# Altium PCB 2016_Carte_Batteries.PcbDoc
Units mil, origin at the board's own origin, x right, y up, seen from the top; angles counter-clockwise.
Board outline 1811.02 x 2047.24 mil, 4 copper layers (1-TOP, 2-SIGNAL, 3-GND, 4-BOT), stack 68 mil thick; 9 components, 4 nets, 28 pads, 60 vias.
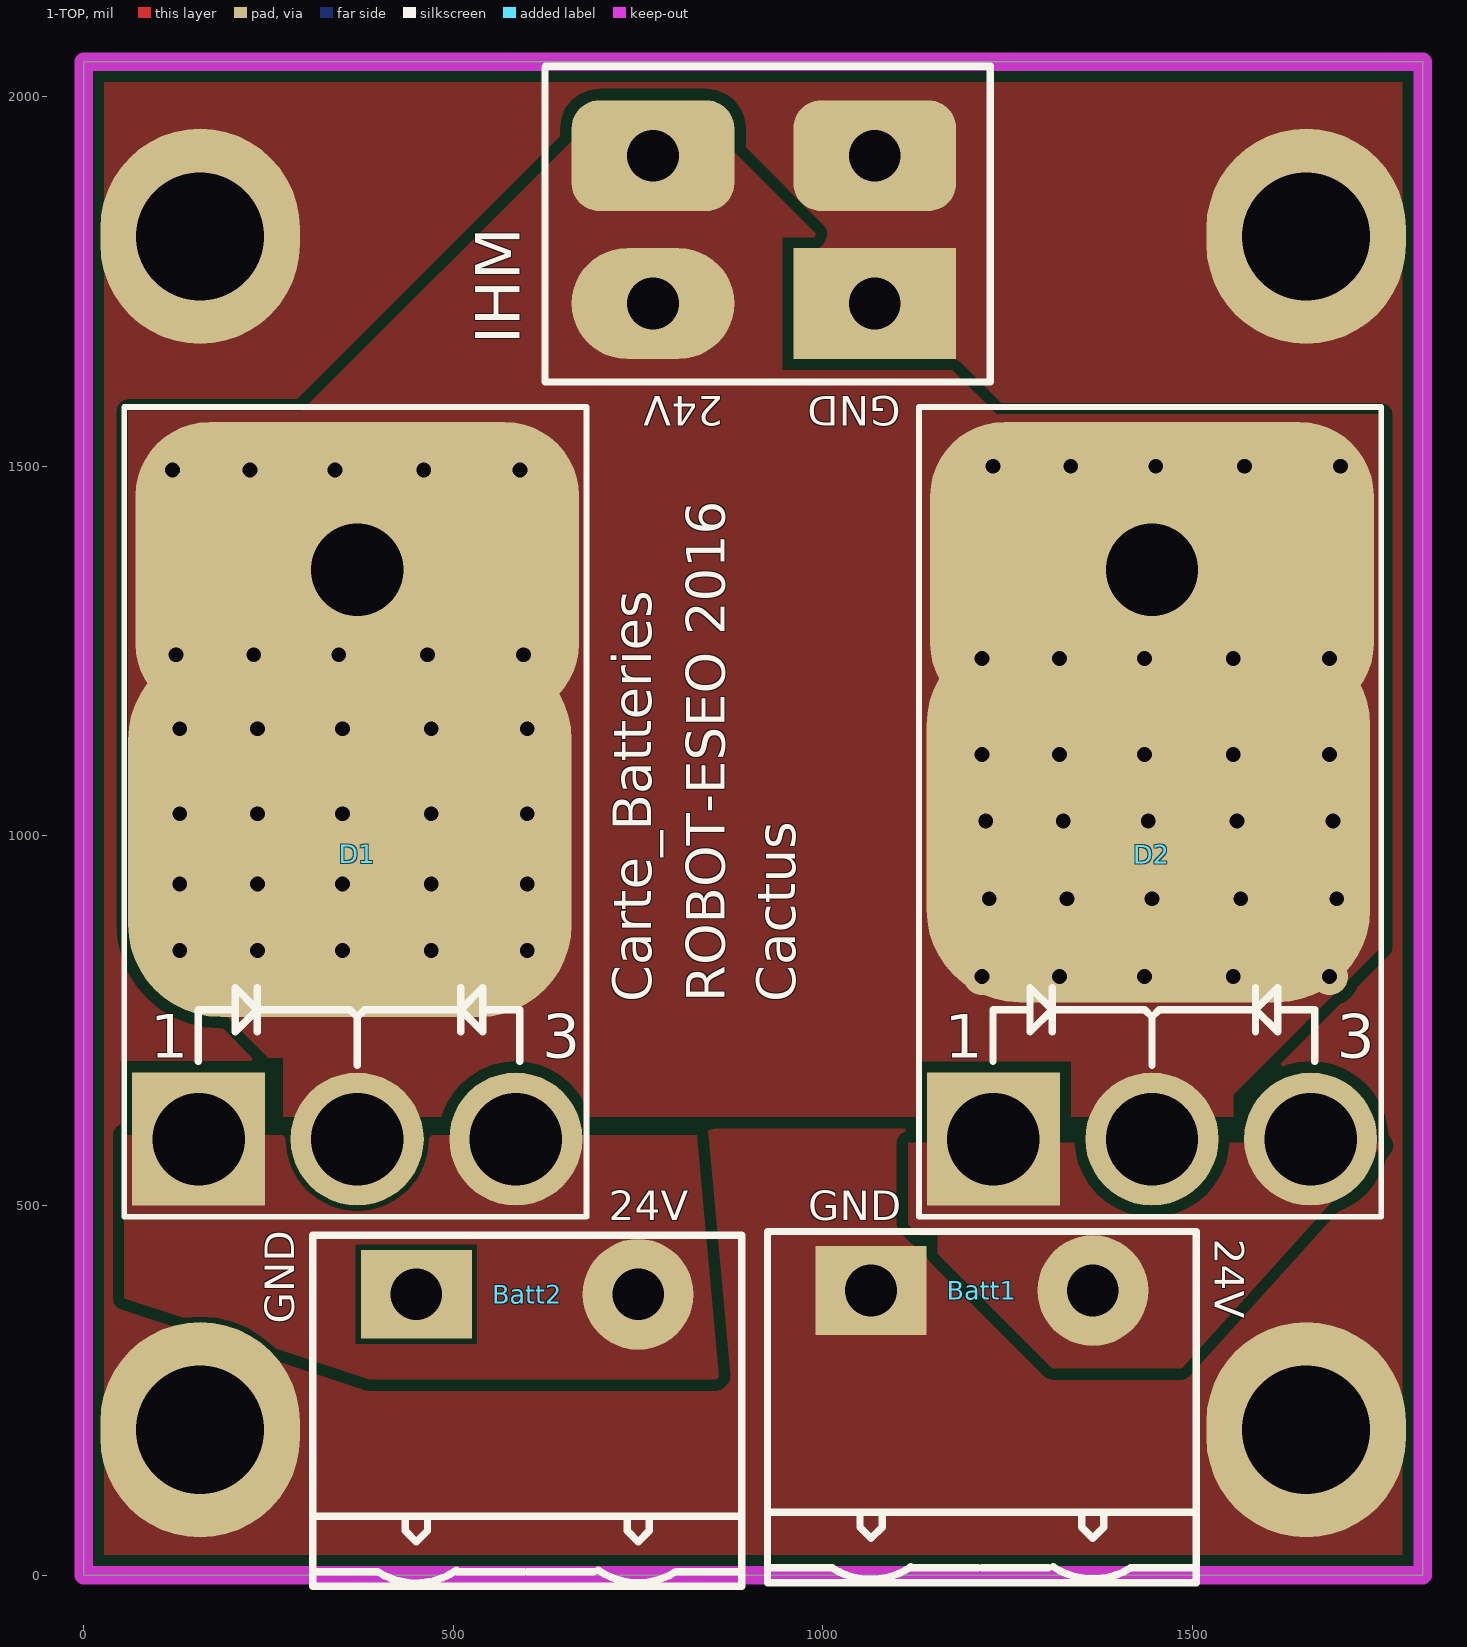
[diagram p0: 1-TOP view]
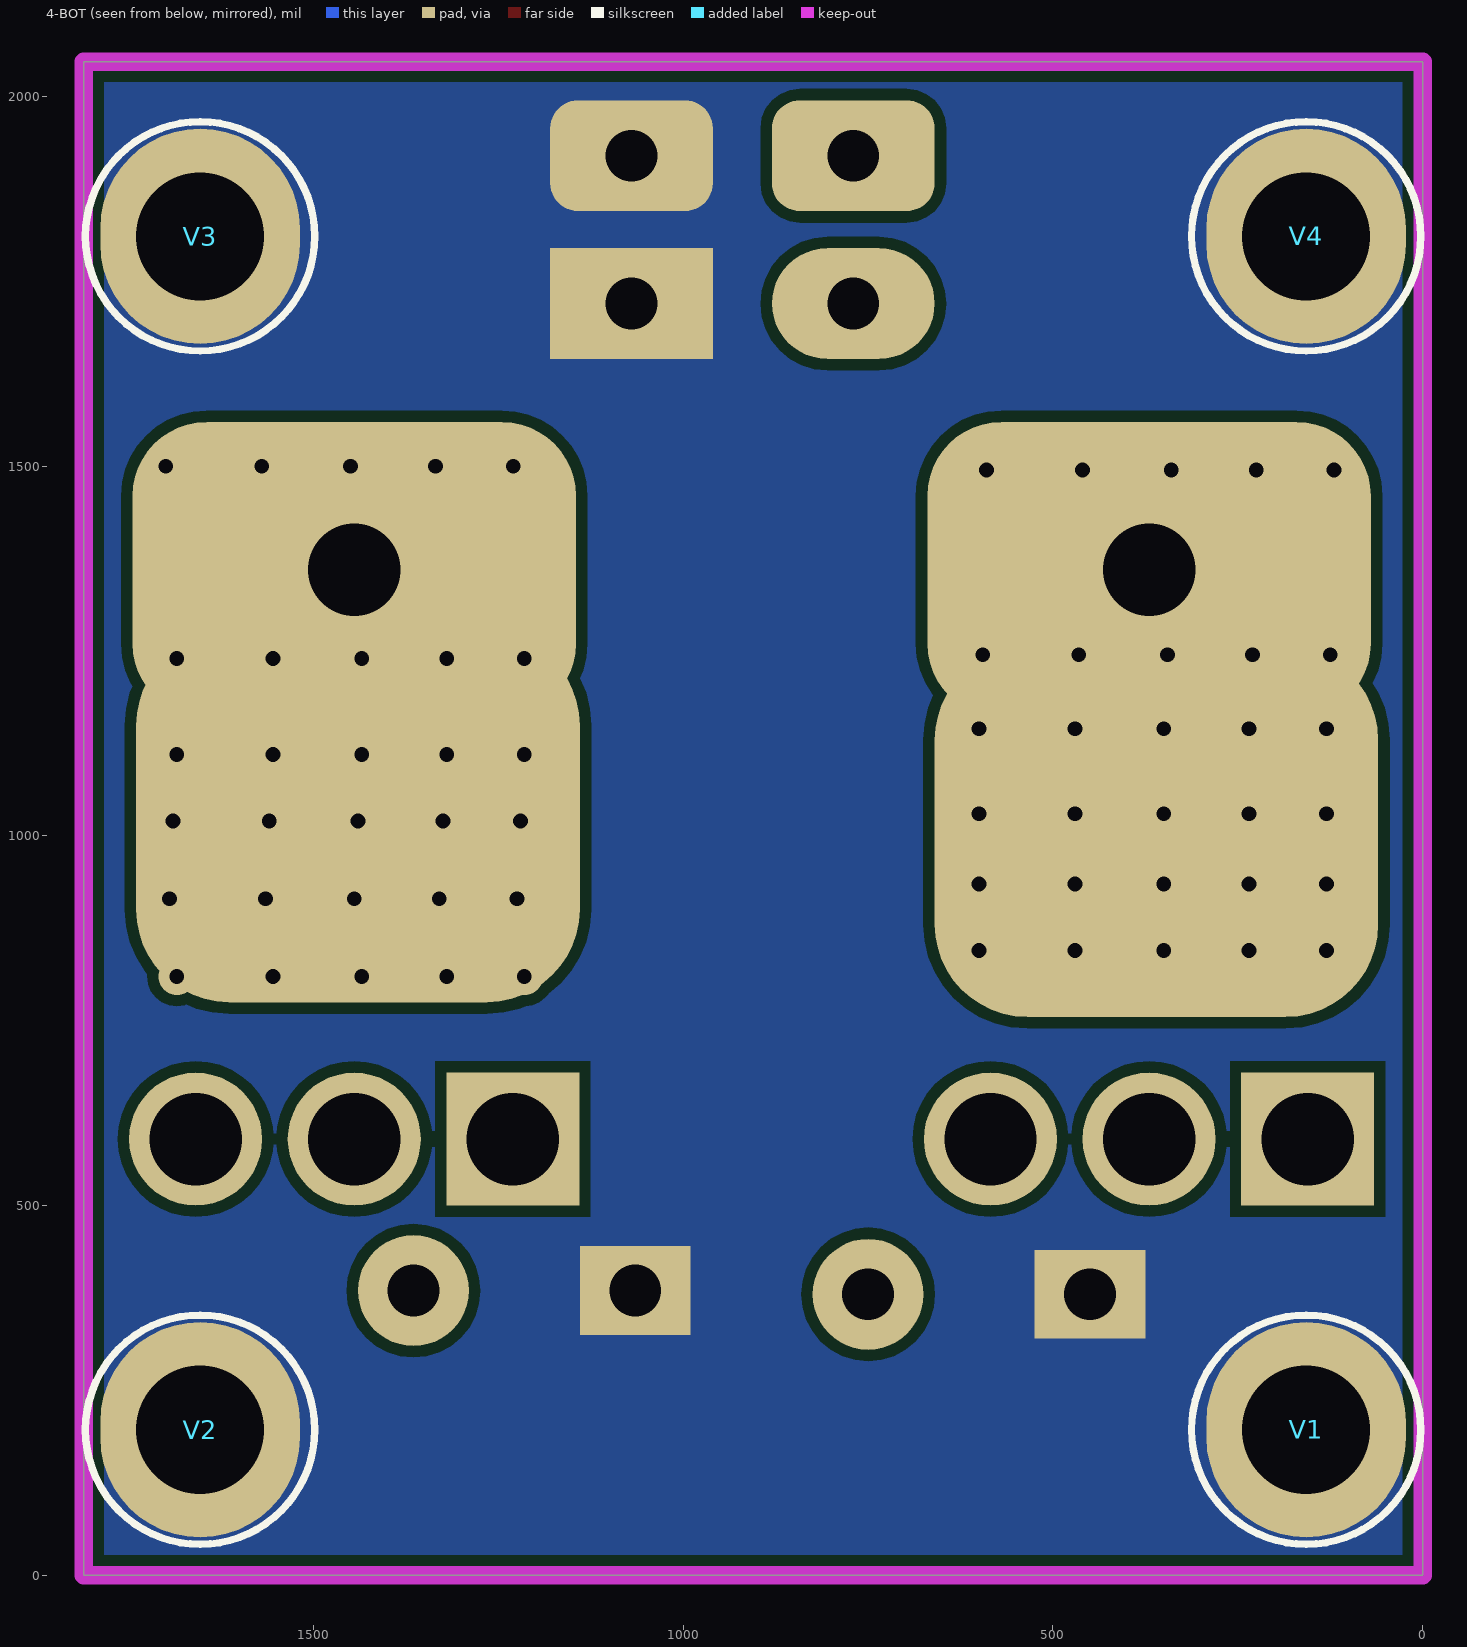
[diagram p1: 4-BOT view, seen from below]
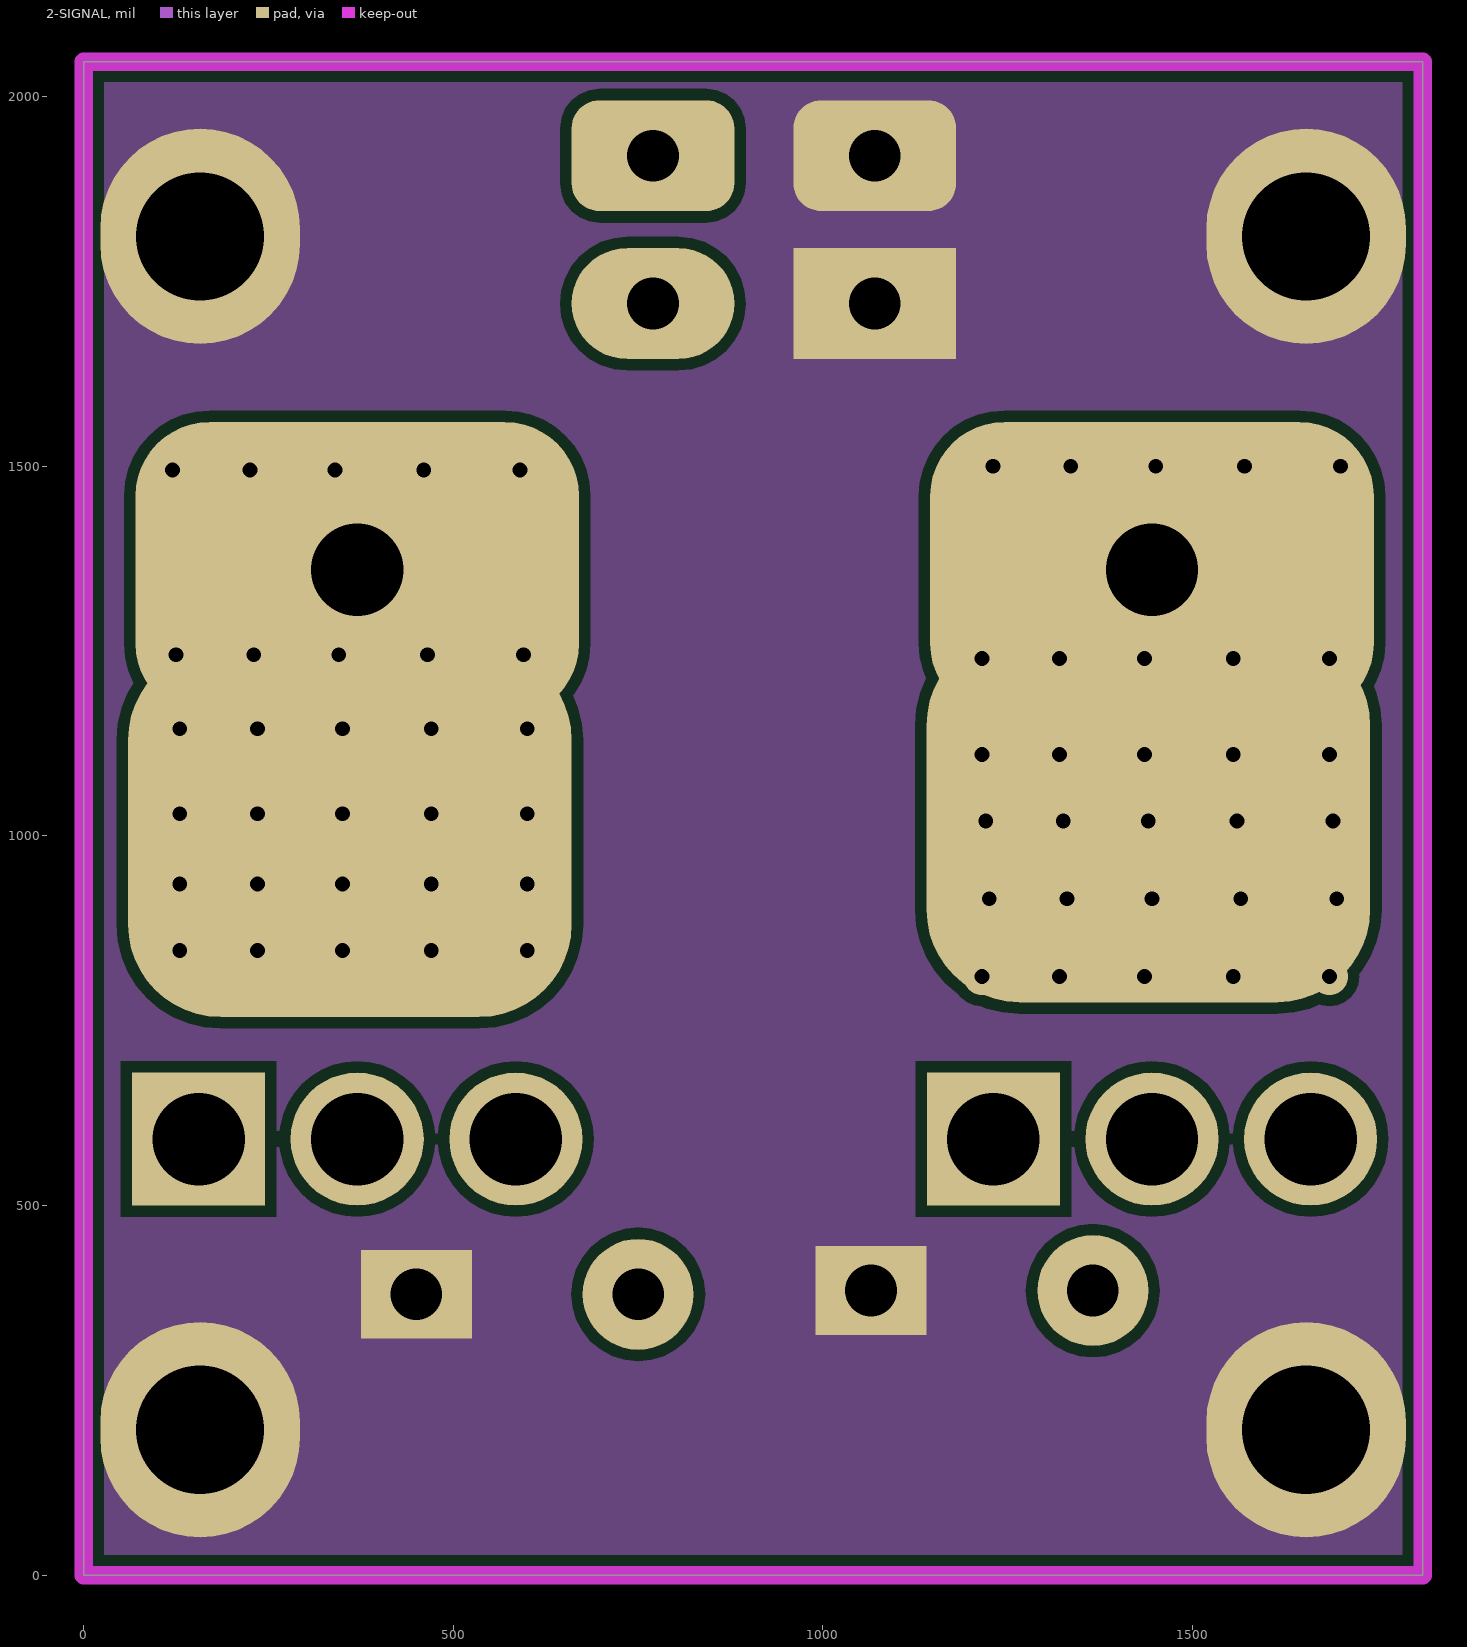
[diagram p2: 2-SIGNAL]
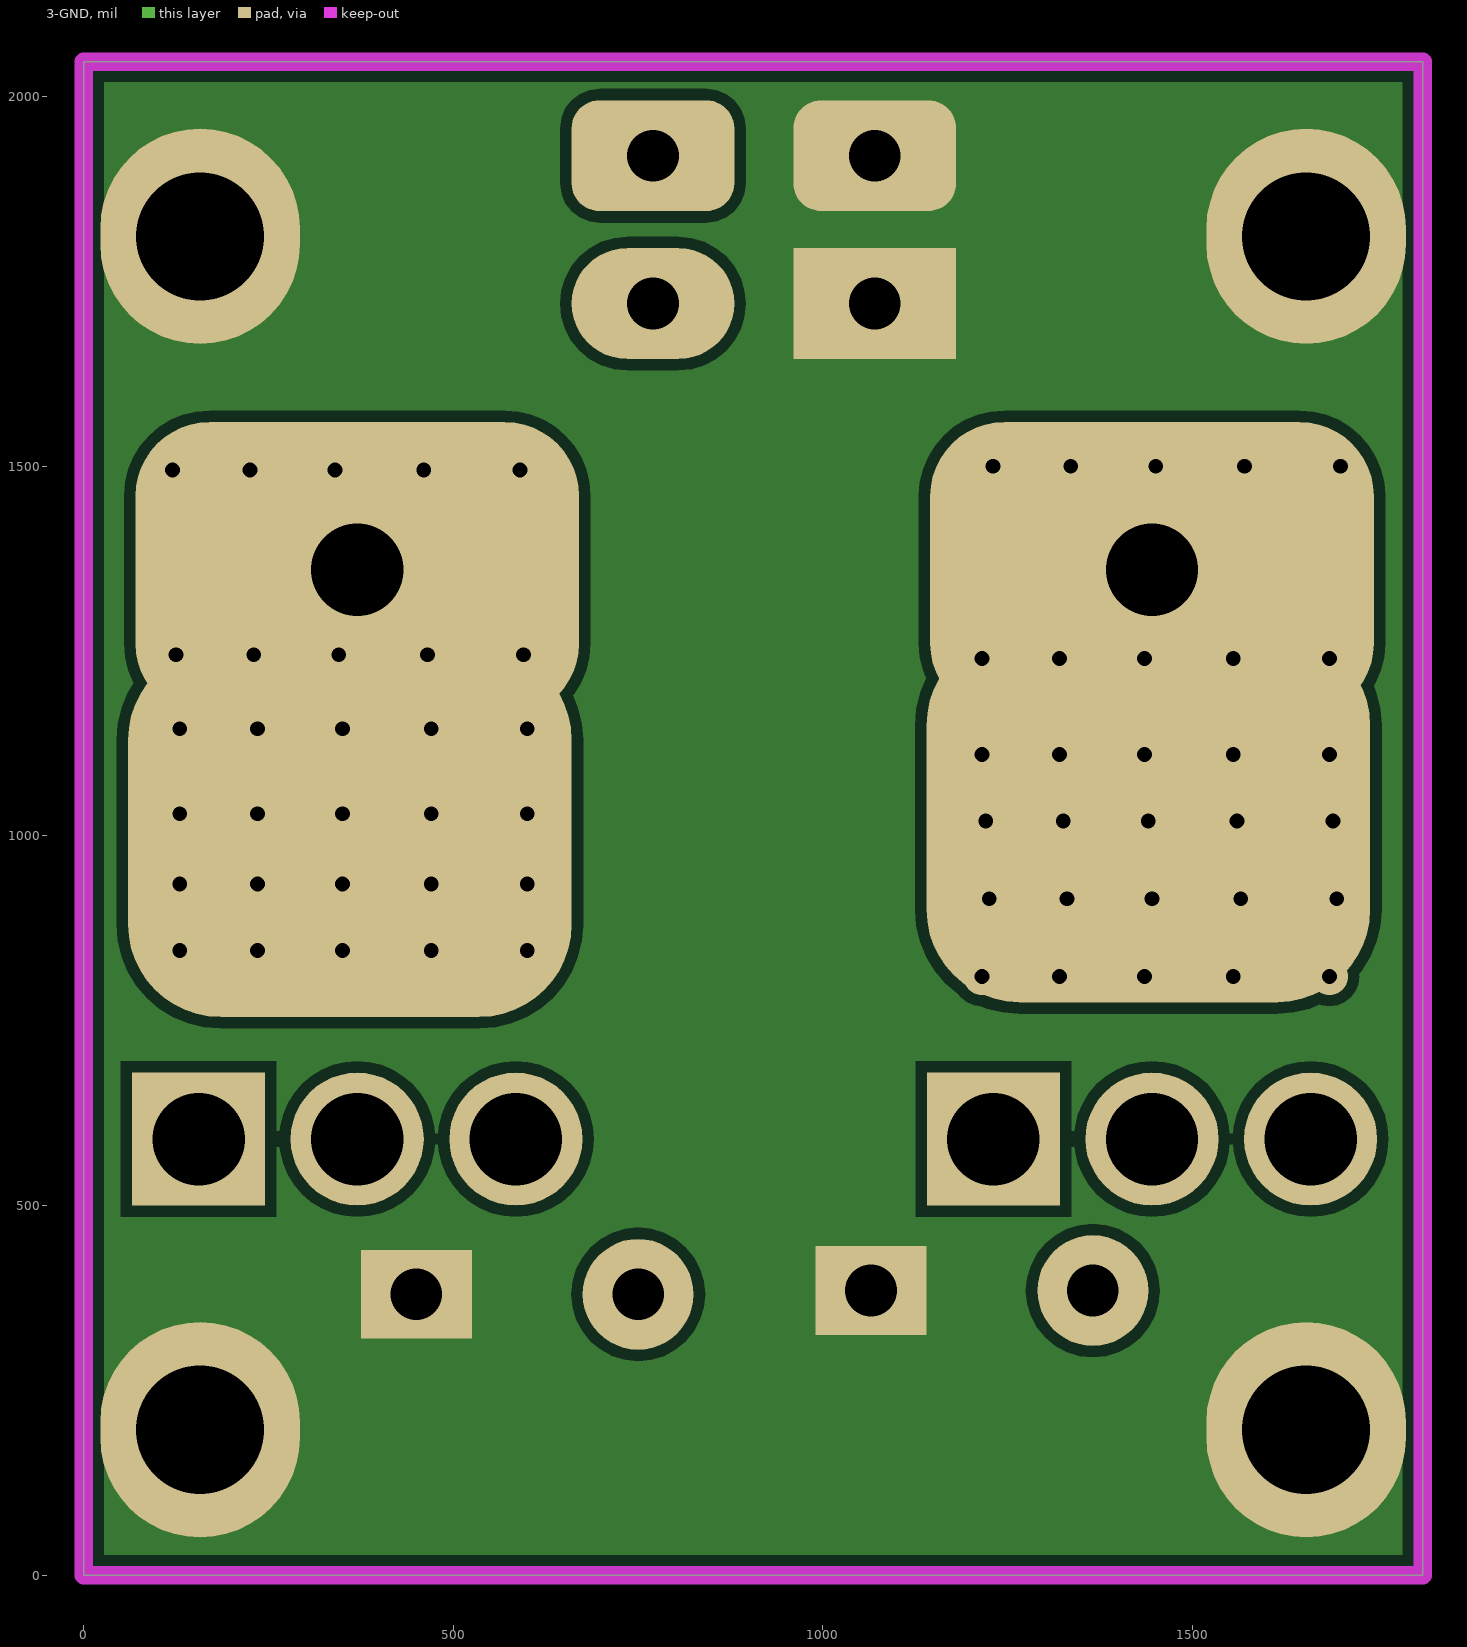
[diagram p3: 3-GND]
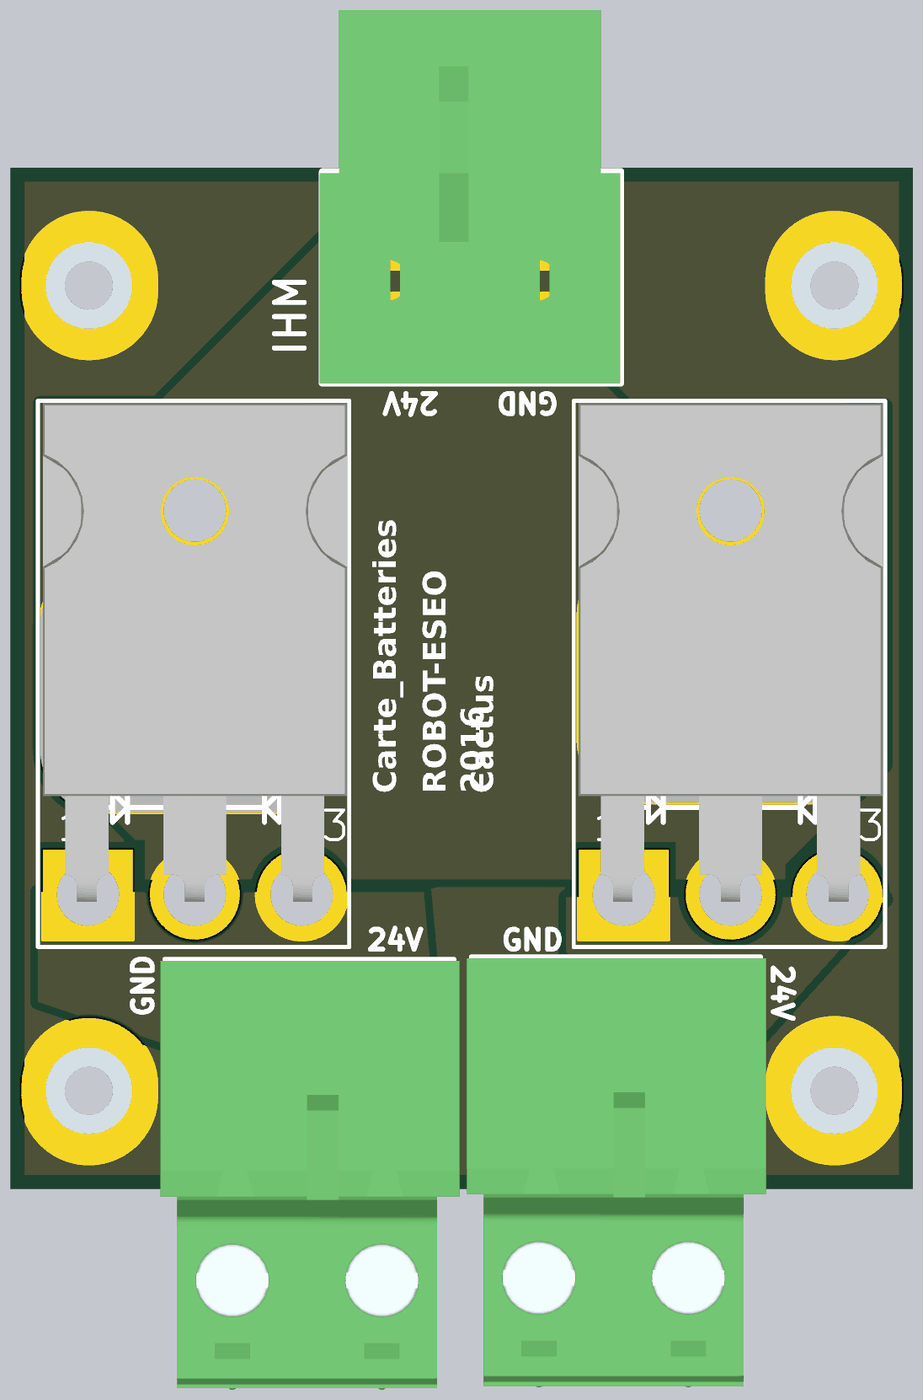
[diagram p4: 3D render of the assembled board from above, using the file's embedded part models]

## Layer stack, top to bottom
Top Solder: solder mask 0.4, Solder Resist, Dk 3.5
1-TOP: signal copper 1.4
Dielectric1: core 20.8, FR-4, Dk 4.8
2-SIGNAL: signal copper 1.4
Dielectric2: prepreg 20.8, FR-4, Dk 4.8
3-GND: signal copper 1.4
Dielectric3: core 20.8, FR-4, Dk 4.8
4-BOT: signal copper 1.4
Bottom Solder: solder mask 0.4, Solder Resist, Dk 3.5

## Board outline
0,0 0,2047.24 1811.02,2047.24 1811.02,0

## Design rules (kind name [scope] priority, off if disabled: settings)
Clearance Clearance_1 [InNamedPolygon('4-GND') Or  InNamedPolygon('1-BATIHM') Or  InNamedPolygon('24V_BAT1') Or  InNamedPolygon('1-GND') Or  InNamedPolygon('3-GND') Or  InNamedPolygon('2-GND') Or  InNamedPolygon('24V_BAT1')] p1: gap=15
Clearance [All] p2: gap=7
FabricationTestpoint [(IsPad And (OnTopLayer Or OnBottomLayer))] p1: side=3 testpointundercomponent=TRUE minsize=40 maxsize=100 preferedsize=60 minholesize=0 maxholesize=40 preferedholesize=32 testpointgrid=1 allowsidetop=TRUE allowsidebottom=TRUE usegrid=TRUE gridtolerance=0.01
HoleSize [All] p1: absolutevalues=TRUE maxlimit=200 minlimit=1 maxpercent=80.000 minpercent=20.000
PlaneConnect [All] p1: planeconnectstyle=Direct reliefexpansion=20 reliefentries=4 reliefconductorwidth=10 reliefairgap=10
PolygonConnect [All] p1: connectstyle=Direct reliefconductorwidth=10 reliefentries=4 polygonreliefangle="90 Angle" airgapwidth=10
RoomDefinition 2016_Carte_Batteries [InComponentClass('2016_Carte_Batteries')] p1: confinementstyle=ConfineIn formatcopy=TRUE lockcomponents=FALSE outline 2970,-560 3355,-560 3355,-1220 2970,-1220
RoutingVias [All] p1: holewidth=28 width=50 viastyle="Through Hole" minholewidth=28 minwidth=50 maxholewidth=28 maxwidth=50
SilkToSolderMaskClearance SilkscreenOverComponentPads [IsPad] p1: minsilkscreentomaskgap=10 clearancetoexposedcopper=TRUE
SolderMaskExpansion [All] p1: expansion=4
Width [All] p1: maxlimit=200 minlimit=10 preferedwidth=15
25 further rules are at their usual default settings.

## Components (designator, comment, footprint, x,y, rotation, side; value= is the part's Value field where it differs from the comment)
Batt1 "FEMELLE A SOUDER 7.62mm" BORNIER2_FEM_COUDE 1065,385 r0 top
Batt2 "FEMELLE A SOUDER 7.62mm" BORNIER2_FEM_COUDE 450,380 r0 top
D1 "Diode Shottky double STPS60L30CW" TO247 370,590 r0 top
D2 "Diode Shottky double STPS60L30CW" TO247 1445,590 r0 top
IHM "MALE A SOUDER 7.62mm" BORNIER2_FEM_HORIZ 1070,1720 r180 top
V1 "" ENTRETOISE_CMS 157.48,196.85 r180 bottom
V2 "" ENTRETOISE_CMS 1653.54,196.85 r180 bottom
V3 "" ENTRETOISE_CMS 1653.54,1811.02 r180 bottom
V4 "" ENTRETOISE_CMS 157.48,1811.02 r180 bottom

## Footprints (in the part's own frame and the unit in brackets; to place one, negate y for a bottom-side part, rotate by r counter-clockwise, add the part's x,y. Pads: shape width x height; smd on the part's side, far side on the other; paste and mask are expansions set on the pad)
BORNIER2_FEM_COUDE [mil] "Connector; Header; 2 Position; Right Angle; Female; Pin Spacing=5.08mm Green"
  rect 150x120 hole 70: 1(0,0)
  round 150 hole 70: 2(300,0)
  silkscreen extent -140,-395 440,80, body extent -149,-783 451,77, height 598
BORNIER2_FEM_HORIZ [mil] "Connector; Header; 2 Position; Right Angle; Female; Pin Spacing=7.62mm Green"
  rect 220x150 hole 70: 1(0,0)
  rrect50% 220x150 hole 70: 1(0,-200) 2(300,-200)
  oval 220x150 hole 70: 2(300,0)
  silkscreen extent -156,-321 446,106, body extent -154,-643 450,105, height 426
ENTRETOISE_CMS [mm] "Entretoise CMS Wurth trou 4.4mm"
  oval 6.858x7.4 hole 4.4: 1(0,0)
  silkscreen extent -3.94,-3.94 3.94,3.94, body extent -2.99,-3 2.99,2.98, height 3
TO247 [mil] "TO, Thru-Hole, Vertical, Heatsink Mounted; 3 In-Line Leads"
  rect 180x180 hole 125: 1(-214.5,0)
  round 180 hole 125: 2(0,0) 3(214.5,0)
  rrect50% 600x400 hole 125: 4(0,770)
  silkscreen extent -315,-105 310,990, body extent -305,-15 305,985, height 197

## Part data
Batt1 Batt2 IHM: library part BORNIER2, "Terminal blocks, 2 pins, pitch=5mm"
D1 D2: "DIODE SCHOTTKY DOUBLE"
V1 V2 V3 V4: library part "Entretoise WURTH CMS", "Entretoise Wurth"

## Free pads (board coordinates)
  rrect50% 600x500 smd: 0(360,1005) 0(1440,1025)
  rrect50% 600x500 on Mid1: 0(360,1005) 0(1440,1025)
  rrect50% 600x500 smd far side: 0(360,1005) 0(1440,1025)
  rrect50% 600x500 on Mid2: 0(360,1005) 0(1440,1025)

## Via types
v1: diameter 50, hole 20, 1-TOP to 4-BOT, 60 vias

## Nets (pads, with @x,y where several pads share a name; then routed paths per layer and width w, separated by ;. In a path a pad name is that pad's centre, name@x,y a point inside that pad or via, vN(x,y) a via of type N, cw(c..) or ccw(c..) an arc to the next point about the centre after c; other vN are vias at no path point)
24V_BAT1: Batt1.2 D2.1 D2.3
24V_BAT2: Batt2.2 D1.1 D1.3
24VIHM: D1.2 D1.4 D2.2 D2.4 IHM.2 pad.0
  other v1: 1215,810 1320,810 1435,810 1555,810 1685,810 130,845 235,845 350,845 470,845 600,845 1225,915 1330,915 1445,915 1565,915 1695,915 130,935 235,935 350,935 470,935 600,935 1220,1020 1325,1020 1440,1020 1560,1020 1690,1020 130,1030 235,1030 350,1030 470,1030 600,1030 1215,1110 1320,1110 1435,1110 1555,1110 1685,1110 130,1145 235,1145 350,1145 470,1145 600,1145 1215,1240 1320,1240 1435,1240 1555,1240 1685,1240 125,1245 230,1245 345,1245 465,1245 595,1245 120,1495 225,1495 340,1495 460,1495 590,1495 1230,1500 1335,1500 1450,1500 1570,1500 1700,1500
GND: Batt1.1 Batt2.1 IHM.1 V1.1 V2.1 V3.1 V4.1

## Polygon pours and split planes (outlines as drawn)
24V_BAT1 on 1-TOP "24V_BAT1" (solid, pour order 9): 1115,585 1115,475 1310,280 1485,280 1760,585
GND on 1-TOP "1-GND" (solid, pour order 14): 20,2025 1790,2025 1790,25 20,25
24VIHM on 1-TOP "1-BATIHM" (solid, pour order 8): 270,620 1555,620 1555,650 1755,850 1755,1570 1235,1570 855,1950 670,1950 295,1575 60,1575 60,890 250,700 270,700
24V_BAT2 on 1-TOP "24V_BAT1" (solid, pour order 10): 55,595 55,374.38 385.88,265 859.55,265 829.55,595
GND on 2-SIGNAL "2-GND" (solid, pour order 13): 20,2025 1790,2025 1790,25 20,25
GND on 3-GND "3-GND" (solid, pour order 12): 20,2025 1790,2025 1790,25 20,25
GND on 4-BOT "4-GND" (solid, pour order 11): 20,2025 1790,2025 1790,25 20,25

## Keep-outs
Keep-Out Layer:
  the board outline again, w25

## Silkscreen, mask and mechanical layers (free items; w line width, h text height)
Top Overlay:
  text "24V" at 865,1595 h40 r180
  text "GND" at 1105,1595 h40 r180
  text "Carte_Batteries" at 785,775 h90 r90
  text "ROBOT-ESEO 2016" at 885,775 h90 r90
  text "Cactus" at 980,775 h90 r90
  text "24V" at 710,480 h40
  text "GND" at 980,480 h40
  text "24V" at 1530,455 h40 r270
  text "GND" at 285,340 h40 r90
Bottom Overlay:

## Text inside footprints (layer, text, board x,y; h text height)
D1: Top Overlay "1" at 90,700 h59.06; Top Overlay "3" at 620,700 h59.06
D2: Top Overlay "1" at 1165,700 h59.06; Top Overlay "3" at 1695,700 h59.06